# EAGLE board gnd_plane (EAGLE 9.6.2)
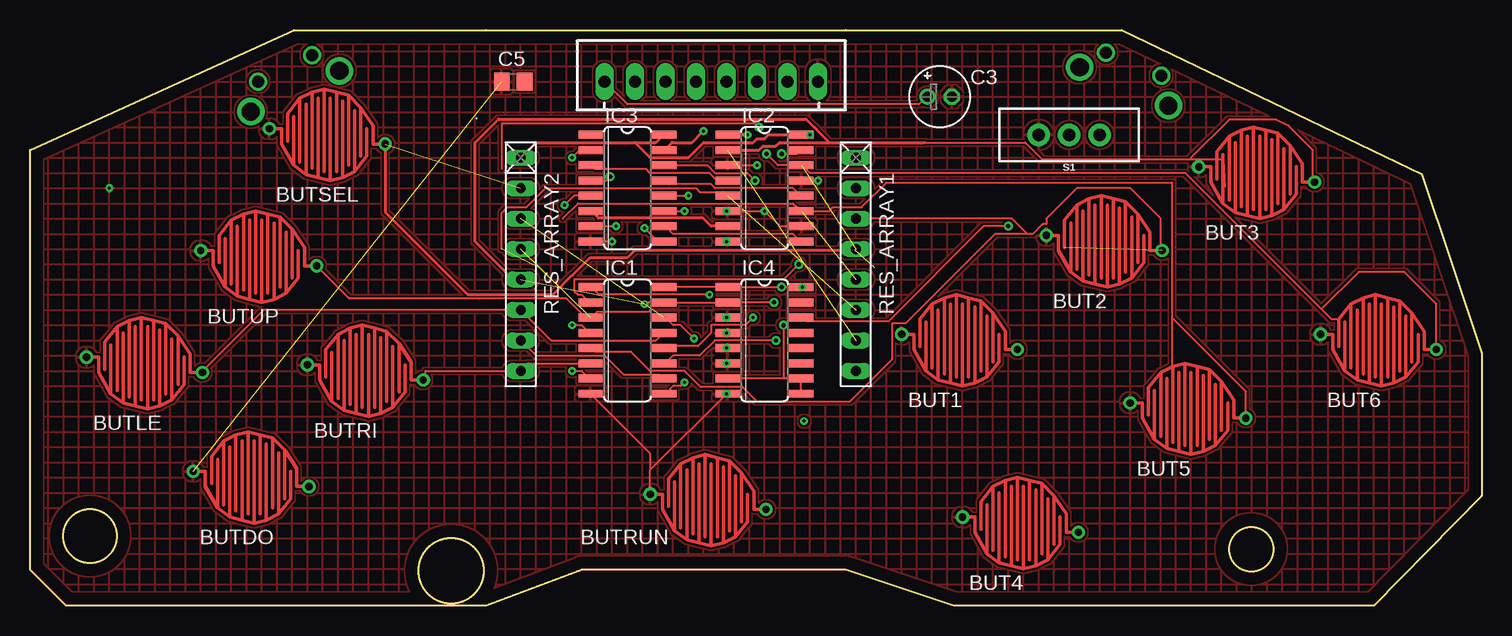
[diagram p0: board, top side]
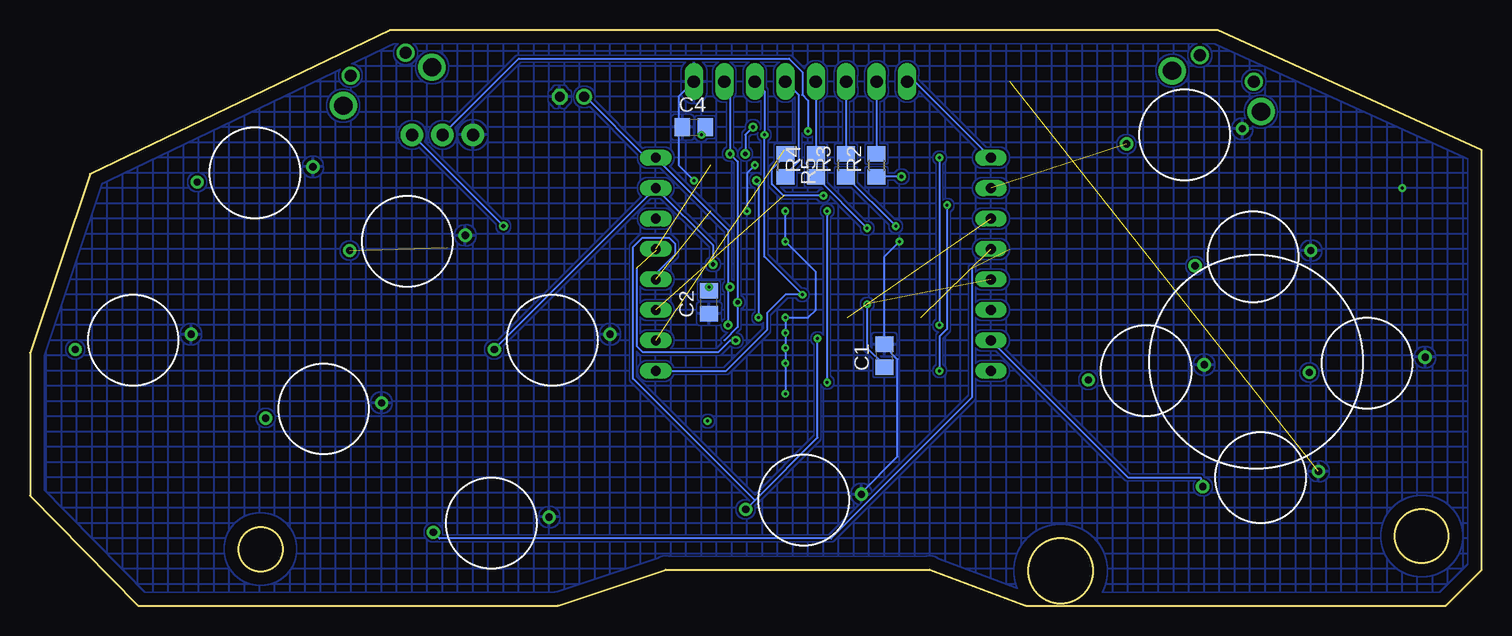
[diagram p1: board, bottom side, seen from below]

Size 121.02 x 48 mm. Coordinates in mm from the lower left corner, seen from the top.
Outline: 0,38 22,48 38,48 38,48 68,48 68,48 91,48 116,36 121.02,21.08 121.02,9.16 112,0 77,0 68,3 46,3 38,0 3,0 0,3 0,38
Outline: circle at 5,5.8 radius 2.24
Outline: circle at 101.8,4.7 radius 1.84
Outline: circle at 35.1,2.9 radius 2.7
Copper layers (1*16): Top 0.035mm / dielectric 1.5mm / Bottom 0.035mm
Design rules "default *": minimum track width 6mil, minimum drill 0.35mm, track to track 6mil, track to pad 6mil, pad to pad 6mil, via to via 6mil, smd to smd 6mil, copper to edge 40mil, drill to drill 6mil, minimum pad ring 10mil, minimum via ring 8mil, stop-mask expansion 10mil, vias tented up to drill 14mil, thermal gap 10mil

## Footprints (pad centres in the part's own frame; a part is rotated, then mirrored left to right if it is on the bottom)
BUTTONPAD = drill 0.6: 1 0,0.508; 2 9.652,-0.762
C0805 = smd 1.3 x 1.5: 1 -0.95,0; 2 0.95,0
E2-5 = drill 0.813 pad 1.27: + -1.016,0 | drill 0.813 pad 1.27 octagon: - 1.016,0
JST-XH-08-PACKAGE-LONG-PAD = drill 1.016 long: 1 -8.89,0; 2 -6.35,0; 3 -3.81,0; 4 -1.27,0; 5 1.27,0; 6 3.81,0; 7 6.35,0; 8 8.89,0
SO16 = smd 0.66 x 2.032: 1 -4.445,-3.073; 2 -3.175,-3.073; 3 -1.905,-3.073; 4 -0.635,-3.073; 5 0.635,-3.073; 6 1.905,-3.073; 7 3.175,-3.073; 8 4.445,-3.073; 9 4.445,3.073; 10 3.175,3.073; 11 1.905,3.073; 12 0.635,3.073; 13 -0.635,3.073; 14 -1.905,3.073; 15 -3.175,3.073; 16 -4.445,3.073
R0805 = smd 1.3 x 1.5: 1 -0.95,0; 2 0.95,0
RN-8 = drill 0.813 long: 1 -8.89,0; 2 -6.35,0; 3 -3.81,0; 4 -1.27,0; 5 1.27,0; 6 3.81,0; 7 6.35,0; 8 8.89,0
SWITCH_SPDT_PTH_11.6X4.0MM = drill 1.016 pad 1.88: 1 0,2.54; 2 0,0; 3 0,-2.54

## Placement (x,y rotation side)
BUT1  BUTTONPAD  [BUTTONPAD]  72.66,22.11 0 top
BUT2  BUTTONPAD  [BUTTONPAD]  84.72,30.37 0 top
BUT3  BUTTONPAD  [BUTTONPAD]  97.42,36.08 0 top
BUT4  BUTTONPAD  [BUTTONPAD]  77.74,6.87 0 top
BUT5  BUTTONPAD  [BUTTONPAD]  91.71,16.4 0 top
BUT6  BUTTONPAD  [BUTTONPAD]  107.58,22.11 0 top
BUTDO  BUTTONPAD  [BUTTONPAD]  13.61,10.68 0 top
BUTLE  BUTTONPAD  [BUTTONPAD]  4.71,20.21 0 top
BUTRI  BUTTONPAD  [BUTTONPAD]  23.13,19.57 0 top
BUTRUN  BUTTONPAD  [BUTTONPAD]  51.7,8.78 0 top
BUTSEL  BUTTONPAD  [BUTTONPAD]  19.95,39.26 0 top
BUTUP  BUTTONPAD  [BUTTONPAD]  14.24,29.1 0 top
C1  100pF  [C0805]  49.8,20.84 90 bottom
C2  [C0805]  64.41,25.29 90 bottom
C3  47u 16V  [E2-5]  75.83,42.43 0 top
C4  [C0805]  65.67,39.89 0 bottom
C5  [C0805]  40.28,43.7 0 top
CONNECTOR  JST-XH-08-PIN-LONG-PAD  [JST-XH-08-PACKAGE-LONG-PAD]  56.78,43.7 0 top
IC1  74HC157D  [SO16]  49.8,22.11 270 top
IC2  74HC157D  [SO16]  61.23,34.81 270 top
IC3  74HC157D  [SO16]  49.8,34.81 270 top
IC4  74HC160D  [SO16]  61.23,22.11 270 top
R2  330  [R0805]  50.44,36.72 90 bottom
R3  330  [R0805]  52.97,36.72 90 bottom
R4  330  [R0805]  55.52,36.72 90 bottom
R5  330  [R0805]  58.06,36.72 270 bottom
RES_ARRAY1  47k  [RN-8]  68.85,28.46 270 top
RES_ARRAY2  47k  [RN-8]  40.91,28.46 270 top
S1  MODE  [SWITCH_SPDT_PTH_11.6X4.0MM]  86.63,39.26 90 top

## Library data of the parts
BUT1-BUT6 BUTDO BUTLE BUTRI BUTRUN BUTSEL BUTUP = tawy
C1-C5 = rcl; SPICEPREFIX: C
CONNECTOR = Rembrandt Electronics - JST XH Connectors v1-0
IC1-IC4 = 74xx-eu
R2-R5 = rcl; SPICEPREFIX: R
RES_ARRAY1 RES_ARRAY2 = resistor-net; OC_FARNELL: unknown; OC_NEWARK: unknown
S1 = SparkFun-Switches; PROD_ID: SWCH-13151

## Nets
CLR: C1.1 CONNECTOR.7 IC1.15 IC2.15 IC4.2 RES_ARRAY2.5
D0: CONNECTOR.2 R2.2
D1: CONNECTOR.3 R3.2
D2: CONNECTOR.4 R4.2
D3: CONNECTOR.5 R5.2
GND: BUT1.1 BUT2.1 BUT3.1 BUT4.1 BUT5.1 BUT6.1 BUTDO.1 BUTLE.1 BUTRI.1 BUTRUN.1 BUTSEL.1 BUTUP.1 C1.2 C2.1 C3.- C4.1 C5.1 CONNECTOR.8 IC1.8 IC2.3 IC2.6 IC2.8 IC2.10 IC2.13 IC3.8 IC4.3 IC4.4 IC4.5 IC4.6 IC4.8 S1.1
N$1: IC3.15 S1.2
N$2: IC1.4 IC3.2
N$3: IC1.7 IC3.5
N$4: IC1.9 IC3.11
N$5: IC1.12 IC3.14
N$6: IC3.4 R2.1
N$7: IC4.14 S1.3
N$8: BUTLE.2 IC1.13 RES_ARRAY2.6
N$9: BUT1.2 IC1.2 RES_ARRAY1.2
N$11: BUTSEL.2 IC1.11 RES_ARRAY2.2
N$12: BUTRUN.2 IC1.14 RES_ARRAY2.3
N$13: BUTUP.2 IC1.3 RES_ARRAY2.4
N$14: BUTDO.2 IC1.10 RES_ARRAY2.7
N$15: BUT2.2 IC1.5 RES_ARRAY1.3
N$16: IC2.4 IC3.3
N$17: IC3.7 R3.1
N$19: IC3.9 R4.1
N$20: IC3.12 R5.1
N$25: IC2.7 IC3.6
N$26: IC2.9 IC3.10
N$27: IC2.12 IC3.13
N$28: BUTRI.2 IC1.6 RES_ARRAY2.8
N$29: BUT3.2 IC2.2 RES_ARRAY1.7
N$30: BUT4.2 IC2.5 RES_ARRAY1.6
N$31: BUT6.2 IC2.14 RES_ARRAY1.4
N$32: BUT5.2 IC2.11 RES_ARRAY1.5
SEL: CONNECTOR.6 IC1.1 IC2.1 RES_ARRAY1.8
VCC: C3.+ CONNECTOR.1 IC1.16 IC2.16 IC3.16 IC4.1 IC4.7 IC4.9 IC4.10 IC4.16 RES_ARRAY1.1 RES_ARRAY2.1

## Tracks (layer width: path | path; a pad name or v marks a point on that pad's centre or on a via)
BUT_SEL  (via drill 1)
  other vias: 23.5,45.9
CLR  (via drill 0.25, 0.35)  (1 unrouted)
  Top 0.152: v51.23,25.13 51.39,25.29 IC1.15 IC4.2 v62.02,25.29 | v62.66,37.67 63.93,37.67 64.25,37.99 IC2.15
  Bottom 0.152: v51.23,25.13 51.23,21.48 49.8,20.05 C1.1 | CONNECTOR.7 62.66,43.23 v62.66,37.67 62.02,37.04 v62.02,25.29 62.02,23.23 63.14,22.11
D0
  Bottom 0.152: CONNECTOR.2 R2.2
D1
  Bottom 0.152: CONNECTOR.3 R3.2
D2
  Bottom 0.152: CONNECTOR.4 R4.2
D3
  Bottom 0.152: CONNECTOR.5 56.94,42.59 56.94,37.04 58.06,35.93 R5.2
GND  (via drill 0.25)  (1 unrouted)
  Top 0.152: IC4.5 58.16,21.81 | IC4.4 58.16,23.08 | IC2.3 v60.59,36.72 | IC2.6 v61.23,32.91 62.5,31.64 IC2.10 | v65.67,35.45 IC2.13 | v48.53,30.37 IC3.8 | BUTRUN.1 51.7,11.32 | 51.7,11.32 v58.06,17.67 | IC1.8 51.7,12.69 51.7,11.32
  Bottom 0.152: BUTRUN.1 51.7,9.41 48.69,12.43 48.69,20.53 49.8,21.64 C1.2 49.8,29.1 v48.53,30.37 | v58.06,32.91 v58.06,30.37 55.52,27.83 55.52,24.65 56.15,24.02 v58.06,24.02 v58.06,22.75 v58.06,21.48 v58.06,20.21 v58.06,17.67 | v60.59,36.72 61.23,36.08 v61.23,32.91 | CONNECTOR.8 66.95,42.43 66.95,36.72 v65.67,35.45
  other vias: 6.62,34.81
  pour Top (hatched): -1.63,48.15 -1.63,2.43 2.81,-2.02 114.57,-2.02 123.46,6.87 123.46,30.37 103.78,50.05 0.27,50.05
  pour Bottom (hatched): -2.27,48.78 -2.27,1.79 2.81,-3.29 112.67,-3.29 122.83,6.87 122.83,41.16 112.03,51.96 0.91,51.96
N$1  (via drill 0.25)
  Top 0.152: 53.61,38.62 55.2,38.62 v56.15,39.58
  Top 0.254: IC3.15 53.51,38.62 53.61,38.62 55.17,38.62 56.12,39.58 v56.15,39.58
  Bottom 0.152: v56.15,39.58 56.15,42.12 56.63,42.59 56.63,44.5 57.74,45.61 80.28,45.61 S1.2
N$2  (via drill 0.25)
  Top 0.152: v45.2,23.38 45.99,23.38 46.62,22.75 IC1.4 | v45.2,37.35 45.83,37.99 IC3.2
  Bottom 0.152: v45.2,37.35 v45.2,23.38
N$3  (via drill 0.25)
  Top 0.152: v45.2,19.57 45.99,19.57 46.62,18.94 IC1.7 | v44.56,33.39 45.36,34.18 IC3.5
  Bottom 0.152: v45.2,19.57 45.2,22.43 44.56,23.07 v44.56,33.39
N$4  (via drill 0.25)
  Top 0.152: v54.56,18.62 54.25,18.3 53.61,18.3 52.97,17.67 IC1.9 | IC3.11 v54.56,32.91
  Bottom 0.152: v54.56,32.91 v54.56,18.62
N$5  (via drill 0.25, 0.35)
  Top 0.152: v60.28,24.02 59.64,23.38 56.78,23.38 56.78,22.75 55.67,21.64 53.13,21.64 52.97,21.48 IC1.12 | v60.44,35.45 59.8,36.08 57.1,36.08 56.47,36.72 IC3.14
  Bottom 0.152: v60.28,24.02 60.28,35.29 v60.44,35.45
N$6  (via drill 0.35)
  Top 0.152: v48.37,35.77 48.05,35.45 IC3.4
  Bottom 0.152: v48.37,35.77 R2.1
N$7  (via drill 0.35)
  Top 0.152: v81.55,31.64 79.49,31.64 71.55,23.7 64.72,23.7 64.41,24.02 IC4.14
  Bottom 0.152: S1.3 v81.55,31.64
N$8
  Top 0.152: IC1.13 52.82,22.75 52.18,22.11 43.45,22.11 RES_ARRAY2.6 19.48,24.65 14.4,19.57 BUTLE.2
N$9  (via drill 0.35)
  Top 0.152: v64.09,28.46 62.82,27.19 45.36,27.19 45.36,26.24 45.67,25.92 45.99,25.92 46.62,25.29 IC1.2
  Bottom 0.152: v64.09,28.46 64.09,30.05 RES_ARRAY1.2 BUT1.2
N$10  (via drill 0.25)
  other vias: 64.41,26.56
N$11  (via drill 0.35)  (2 unrouted)
  Top 0.152: v62.18,22.11 57.1,22.11 55.83,20.84 53.61,20.84 52.97,20.21 IC1.11
  Top 0.254: BUTSEL.2 29.61,32.82 36.47,25.96 43.62,25.96 45.21,27.55 45.23,27.55 46.7,29.02 49.8,29.02 50.44,29.66 68.77,29.66
  Bottom 0.152: v62.18,22.11 62.66,22.11 63.61,21.16 69.96,21.16 70.44,21.64 70.44,28.15
N$12  (via drill 0.25)  (1 unrouted)
  Top 0.152: v55.36,22.27 54.25,23.38 53.61,23.38 52.97,24.02 IC1.14
  Bottom 0.152: v55.36,22.27 55.36,14.02 60.59,8.78 | BUTRUN.2 60.59,8.78 | 68.85,27.67 67.26,29.26 67.26,30.21 67.74,30.69 69.96,30.69 70.75,29.89 70.75,18.94 60.59,8.78
N$13  (1 unrouted)
  Top 0.152: 51.7,24.65 51.55,24.49 47.26,24.49 46.78,24.02 IC1.3 46.31,24.02 44.72,25.61 26.62,25.61 BUTUP.2
N$14
  Top 0.152: RES_ARRAY2.7 42.18,20.84 47.89,20.84 49.48,19.26 52.5,19.26 52.82,18.94 IC1.10
  Bottom 0.152: RES_ARRAY2.7 29.48,10.68 23.45,10.68 BUTDO.2
N$15  (1 unrouted)
  Top 0.152: 83.14,31 83.61,31 84.41,31.8 84.72,31.8 84.72,32.27 87.27,34.81 91.71,34.81 94.25,32.27 94.25,29.73 BUT2.2 | 83.14,31 80.44,31 72.98,23.54 71.87,23.54 71.87,20.53 68.37,17.03 60.59,17.03 59.4,18.23 55.91,18.23 54.56,19.57 51.7,19.57 50.12,21.16 47.1,21.16 46.78,21.48 IC1.5 | 86.15,31.8 86.25,29.86 | RES_ARRAY1.3 81.87,32.27 83.14,31
N$16
  Top 0.152: IC2.4 57.26,35.45 56.63,36.08 51.7,36.08 51.39,36.4 47.1,36.4 46.78,36.72 IC3.3
N$17  (via drill 0.25)
  Top 0.152: IC3.7 v48.85,31.64
  Bottom 0.152: v48.85,31.64 R3.1
N$18  (via drill 1)
  other vias: 94.3,44.2
N$19  (via drill 0.25)
  Top 0.152: v51.23,31.48 52.34,30.37 IC3.9
  Bottom 0.152: v51.23,31.48 R4.1
N$20  (via drill 0.25)
  Top 0.152: IC3.12 v54.88,34.18
  Bottom 0.152: v54.88,34.18 58.21,34.18 59.17,35.13 59.17,36.4 58.06,37.51 R5.1
N$21  (via drill 1)
  other vias: 19,43.7
N$22  (via drill 0.25)
  other vias: 65.04,39.26
N$24  (via drill 1)
  other vias: 89.7,46.1
N$25
  Top 0.152: 58.06,31.64 IC2.7
  Top 0.254: IC3.6 46.78,32.91 47.39,32.3 56.12,32.3 56.78,31.64 IC2.7
N$26
  Top 0.152: IC3.10 52.97,31.64 53.61,31 63.61,31 64.25,30.37 IC2.9
N$27
  Top 0.152: IC3.13 52.97,35.45 53.29,35.13 56.78,35.13 57.1,34.81 63.61,34.81 64.25,34.18 IC2.12
N$28
  Top 0.152: IC1.6 41.55,20.21 RES_ARRAY2.8 32.97,19.57 BUTRI.2
N$29  (1 unrouted)
  Top 0.152: 74.56,38.62 82.98,38.62 84.41,37.2 96.79,37.2 | 67.58,38.62 66.63,38.62 63.14,38.62 | 96.79,37.2 99.49,37.2 99.58,34.94 | BUT3.2 106.95,35.45 106.95,37.99 104.91,40.02 103.86,40.53 99.97,40.53 96.79,37.35 96.79,37.2
  Top 0.254: 40.28,27.19 37.1,30.37 37.1,38.62 39.04,40.57 64.68,40.57 65.38,39.87 65.44,39.87 65.6,39.7 65.6,39.65 66.63,38.62 | IC2.2 60.78,37.99 61.12,38.33 62.2,38.33 62.5,38.62 63.14,38.62 67.58,38.62 74.56,38.62
N$30  (2 unrouted)
  Top 0.152: 39.32,29.73 39.32,32.75 39.8,33.23 41.39,33.23 42.97,34.81 55.52,34.81 55.83,34.5 57.74,34.5 58.06,34.18 IC2.5
  Bottom 0.152: 42.5,28.15 42.5,17.35 54.25,5.6 86.88,5.6 BUT4.2
N$31  (via drill 0.35)  (1 unrouted)
  Top 0.152: 107.66,24.73 108.54,23.86 109.01,23.86 109.11,21.61 | 107.66,24.73 96.31,36.08 65.04,36.08 64.41,36.72 IC2.14 62.34,36.72 v61.39,37.67 | 39.32,36.4 39.32,40.21 60.44,40.21 v60.75,39.89 | BUT6.2 117.24,25.16 114.57,27.83 110.76,27.83 107.66,24.73
  Bottom 0.152: v60.75,39.89 61.39,39.26 v61.39,37.67
N$32  (1 unrouted)
  Top 0.152: 63.93,33.23 64.25,32.91 IC2.11 | 44.4,32.27 45.67,33.54 63.61,33.54 63.93,33.23 | 95.2,24.02 95.2,35.29 71.39,35.29 69.33,33.23 66.95,33.23 66.63,32.91 IC2.11 | 95.2,24.02 95.2,20.05 95.27,13.61 | 63.93,33.23 IC2.11 | BUT5.2 101.36,17.86 95.2,24.02
N$44  (via drill 0.25)
  other vias: 64.53,15.38
S$29  (via drill 1.52)
  other vias: 25.8,44.6
S$30  (via drill 1.52)
  other vias: 18.4,41.2
S$32  (via drill 1.52)
  other vias: 87.5,44.9
S$34  (via drill 1.52)
  other vias: 94.9,41.7
SEL  (via drill 0.25)
  Top 0.152: 58.69,39.26 IC2.1 | v56.63,25.92 47.42,25.92 46.78,26.56 IC1.1
  Top 0.254: v59.8,39.26 58.69,39.26
  Bottom 0.152: CONNECTOR.6 59.8,42.91 v59.8,39.26 59.8,29.1 v56.63,25.92 58.06,25.92 59.56,24.42 59.56,22.99 62.98,19.57 RES_ARRAY1.8
VCC  (via drill 0.35)
  Top 0.152: 52.82,39.26 IC3.16 | 64.25,39.26 IC2.16 | IC1.16 IC4.1 v62.66,26.56 IC4.16 | 64.25,18.94 62.82,18.94 | 62.82,18.94 IC4.7 | 64.25,18.94 64.25,17.67 IC4.9 | 64.25,18.94 IC4.10 | v62.82,23.38 62.82,18.94 | CONNECTOR.1 49.8,41.8 74.09,41.8 74.72,42.43 C3.+
  Top 0.254: RES_ARRAY2.1 42.18,38.62 50.44,38.62 | 50.44,38.62 52.18,38.62 52.82,39.26 | 50.44,38.62 51.7,37.35 54.88,37.35 56.15,38.62 60.28,38.62 60.59,38.94 61.23,38.94 61.55,39.26 IC2.16
  Bottom 0.152: CONNECTOR.1 47.26,43.7 RES_ARRAY2.1 | C3.+ 74.72,42.43 69.64,37.35 RES_ARRAY1.1 62.82,31.32 62.82,26.56 | 62.82,26.56 v62.82,23.38 | 62.82,26.56 v62.66,26.56

## Text on the board
tPlace: .